# Altium PCB 手柄.PcbDoc
Units mm, origin at the board's own origin, x right, y up, seen from the top; angles counter-clockwise.
Board outline 20 x 20 mm, 2 copper layers (Top Layer, Bottom Layer); 1 components, 0 nets, 1 pads, 0 vias.
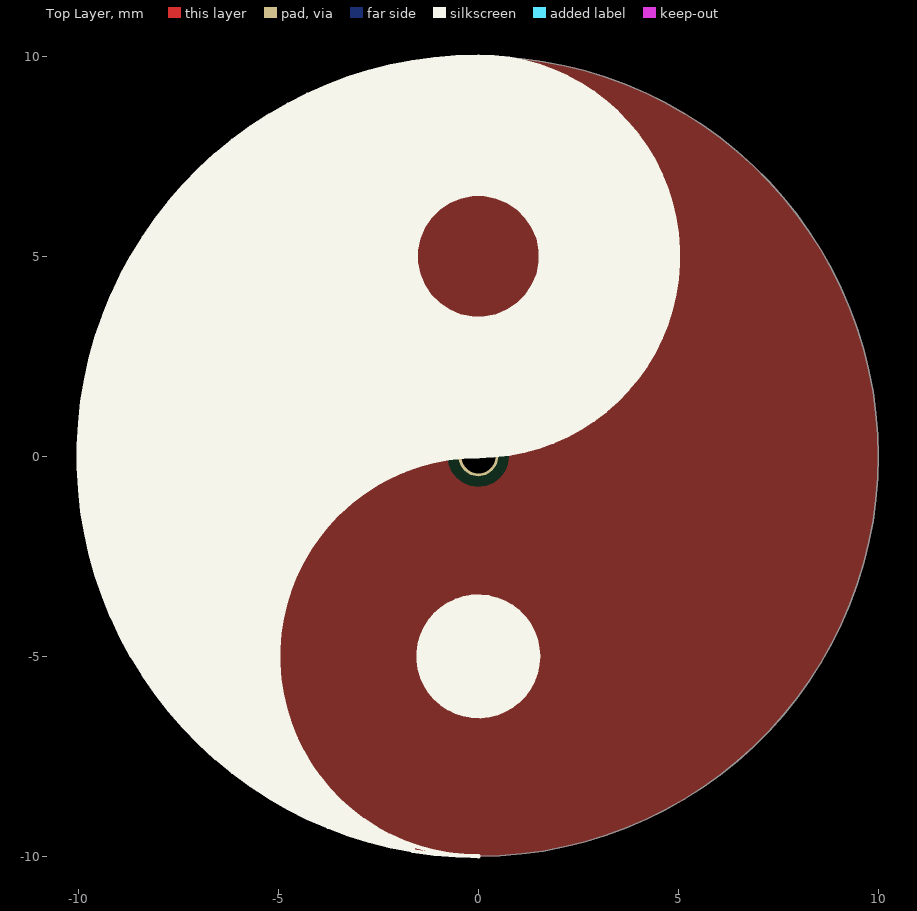
[diagram p0: Top Layer view]
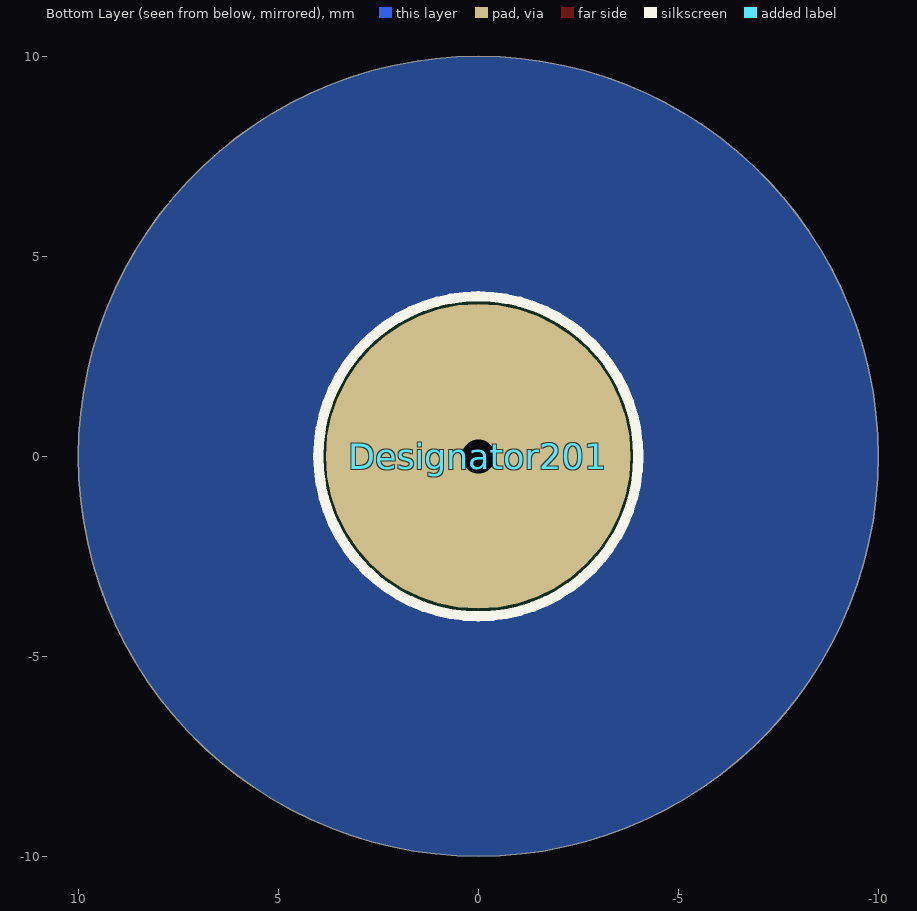
[diagram p1: Bottom Layer view, seen from below]

## Layer stack, top to bottom
Top Solder: solder mask 0.0102, Solder Resist, Dk 3.5
Top Layer: signal copper 0.0356
Dielectric 1: dielectric 0.32, FR-4, Dk 4.8
Bottom Layer: signal copper 0.0356
Bottom Solder: solder mask 0.0102, Solder Resist, Dk 3.5

## Board outline
-10,0 ccw(c0,0) 0,-10 ccw(c0,0) 10,0 ccw(c0,0) 0,10 ccw(c0,0)

## Design rules (kind name [scope] priority, off if disabled: settings)
Clearance [All] p1: gap=0.254
PolygonConnect [All] p1: connectstyle=Relief reliefconductorwidth=0.254 reliefentries=4 polygonreliefangle="90 Angle" airgapwidth=0.254
RoutingVias [All] p1: holewidth=0.711 width=1.27 viastyle="Through Hole" minholewidth=0.711 minwidth=1.27 maxholewidth=0.711 maxwidth=1.27
SolderMaskExpansion [All] p1: expansion=0.102
Width [All] p1: maxlimit=0.254 minlimit=0.254 preferedwidth=0.254
30 further rules are at their usual default settings.

## Components (designator, comment, footprint, x,y, rotation, side; value= is the part's Value field where it differs from the comment)
Designator201 "Comment" M3焊接铜柱 0,0 r180 bottom

## Footprints (in the part's own frame and the unit in brackets; to place one, negate y for a bottom-side part, rotate by r counter-clockwise, add the part's x,y. Pads: shape width x height; smd on the part's side, far side on the other; paste and mask are expansions set on the pad)
M3焊接铜柱 [mm]
  round 7.62 / inner round 7.62 / far side round 1 hole 0.85: 1(0,0)
  silkscreen extent -4,-4 4,4

## Nets (pads, with @x,y where several pads share a name; then routed paths per layer and width w, separated by ;. In a path a pad name is that pad's centre, name@x,y a point inside that pad or via, vN(x,y) a via of type N, cw(c..) or ccw(c..) an arc to the next point about the centre after c; other vN are vias at no path point)
pads on no net: Designator201.1

## Polygon pours and split planes (outlines as drawn)
no net on Top Overlay "Top Layer-No Net" (solid): -1.5,-5 ccw(c0,-5) 0,-6.5 ccw(c0,-5) 1.5,-5 ccw(c0,-5) 0,-3.5 ccw(c0,-5)
no net on Top Overlay "Top Layer-No Net" (solid): 0,-9.998 cw(c0,0) 0,9.998 0,10 cw(c0,5) 0,0 ccw(c0,-4.999)
no net on Bottom Layer "Top Layer-No Net" (solid, pour order 0): -10,0 ccw(c0,0) 0,-10 ccw(c0,0) 10,0 ccw(c0,0) 0,10 ccw(c0,0)
no net on Top Layer "Top Layer-No Net" (solid, pour order 2): -10,0 ccw(c0,0) 0,-10 ccw(c0,0) 10,0 ccw(c0,0) 0,10 ccw(c0,0)

## Silkscreen, mask and mechanical layers (free items; w line width, h text height)
Top Overlay:
  circle w0.1: c0,-5 r1.5
  pour cut-out: -1.5,5 ccw(c0,5) 0,3.5 ccw(c0,5) 1.5,5 ccw(c0,5) 0,6.5 ccw(c0,5)
  lines w0.1: 0,-10 cw(c0,-5) 0,0 ccw(c0,5) 0,10 ; 0,-9.998 cw(c0,0) 0,9.998
Mechanical 1:
  circle w0.1: c0,0 r10